# EAGLE board trill-ring (EAGLE 6.5.0)
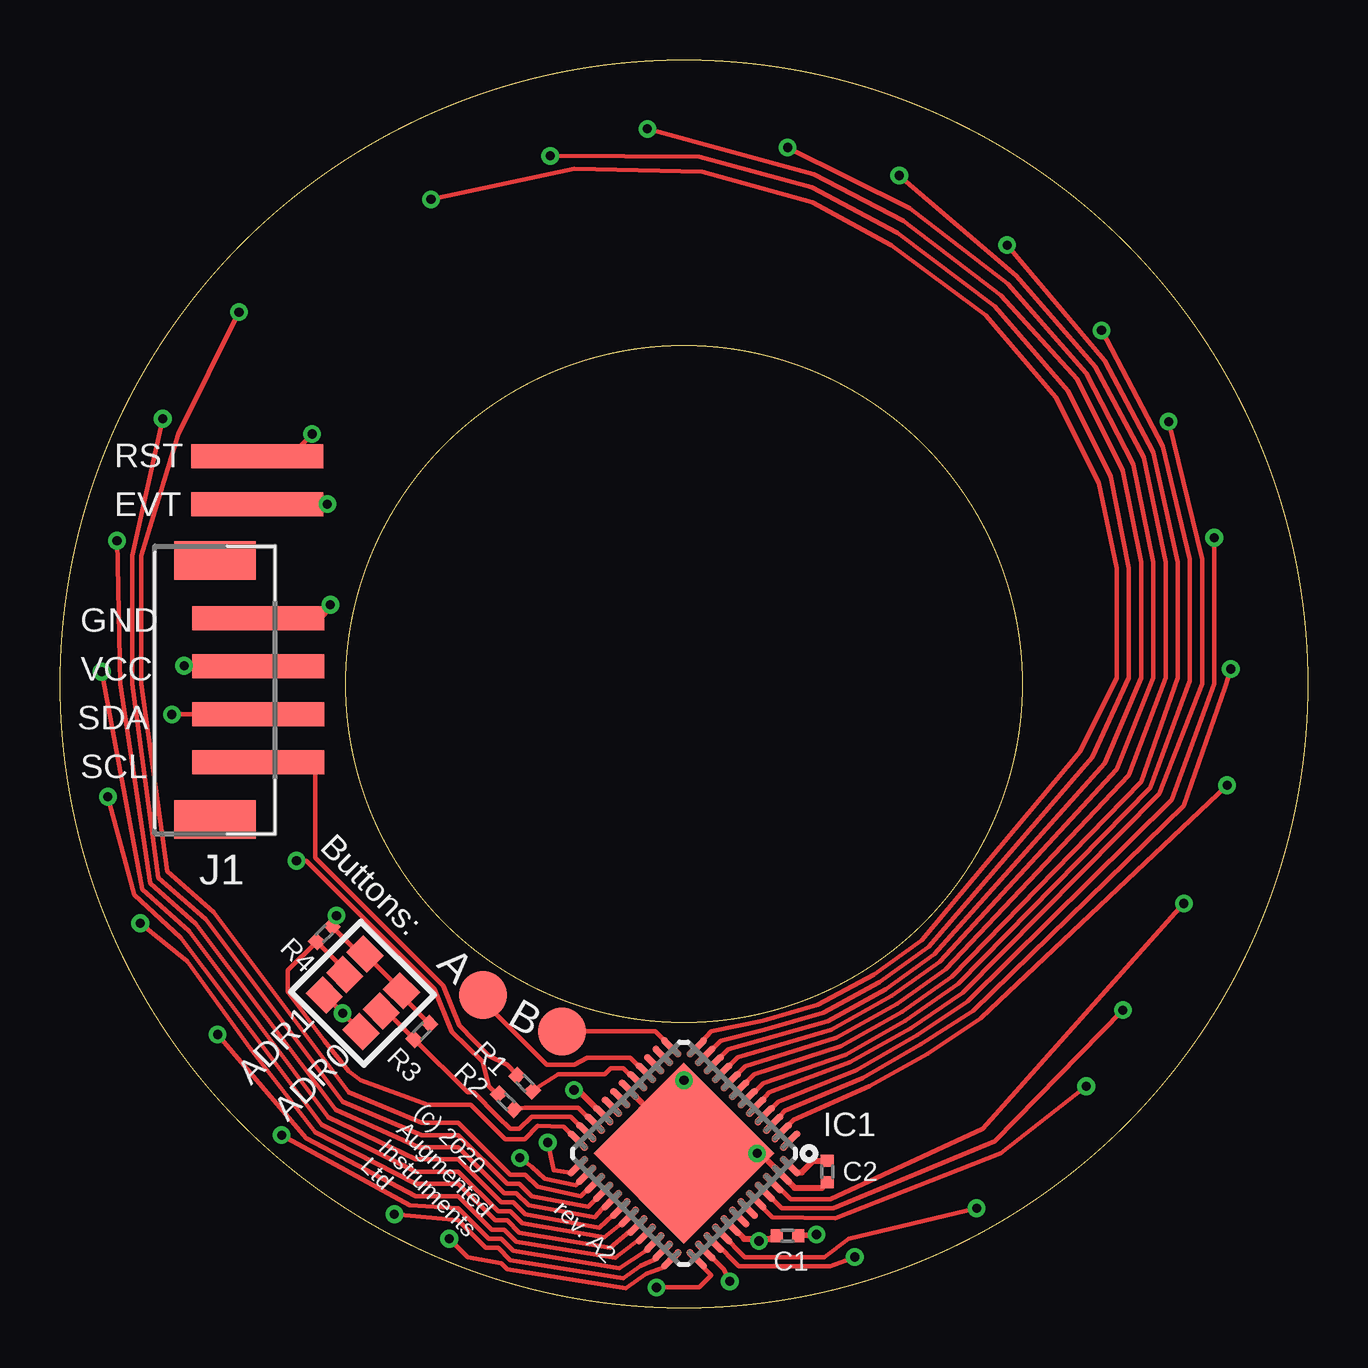
[diagram p0: board, top side]
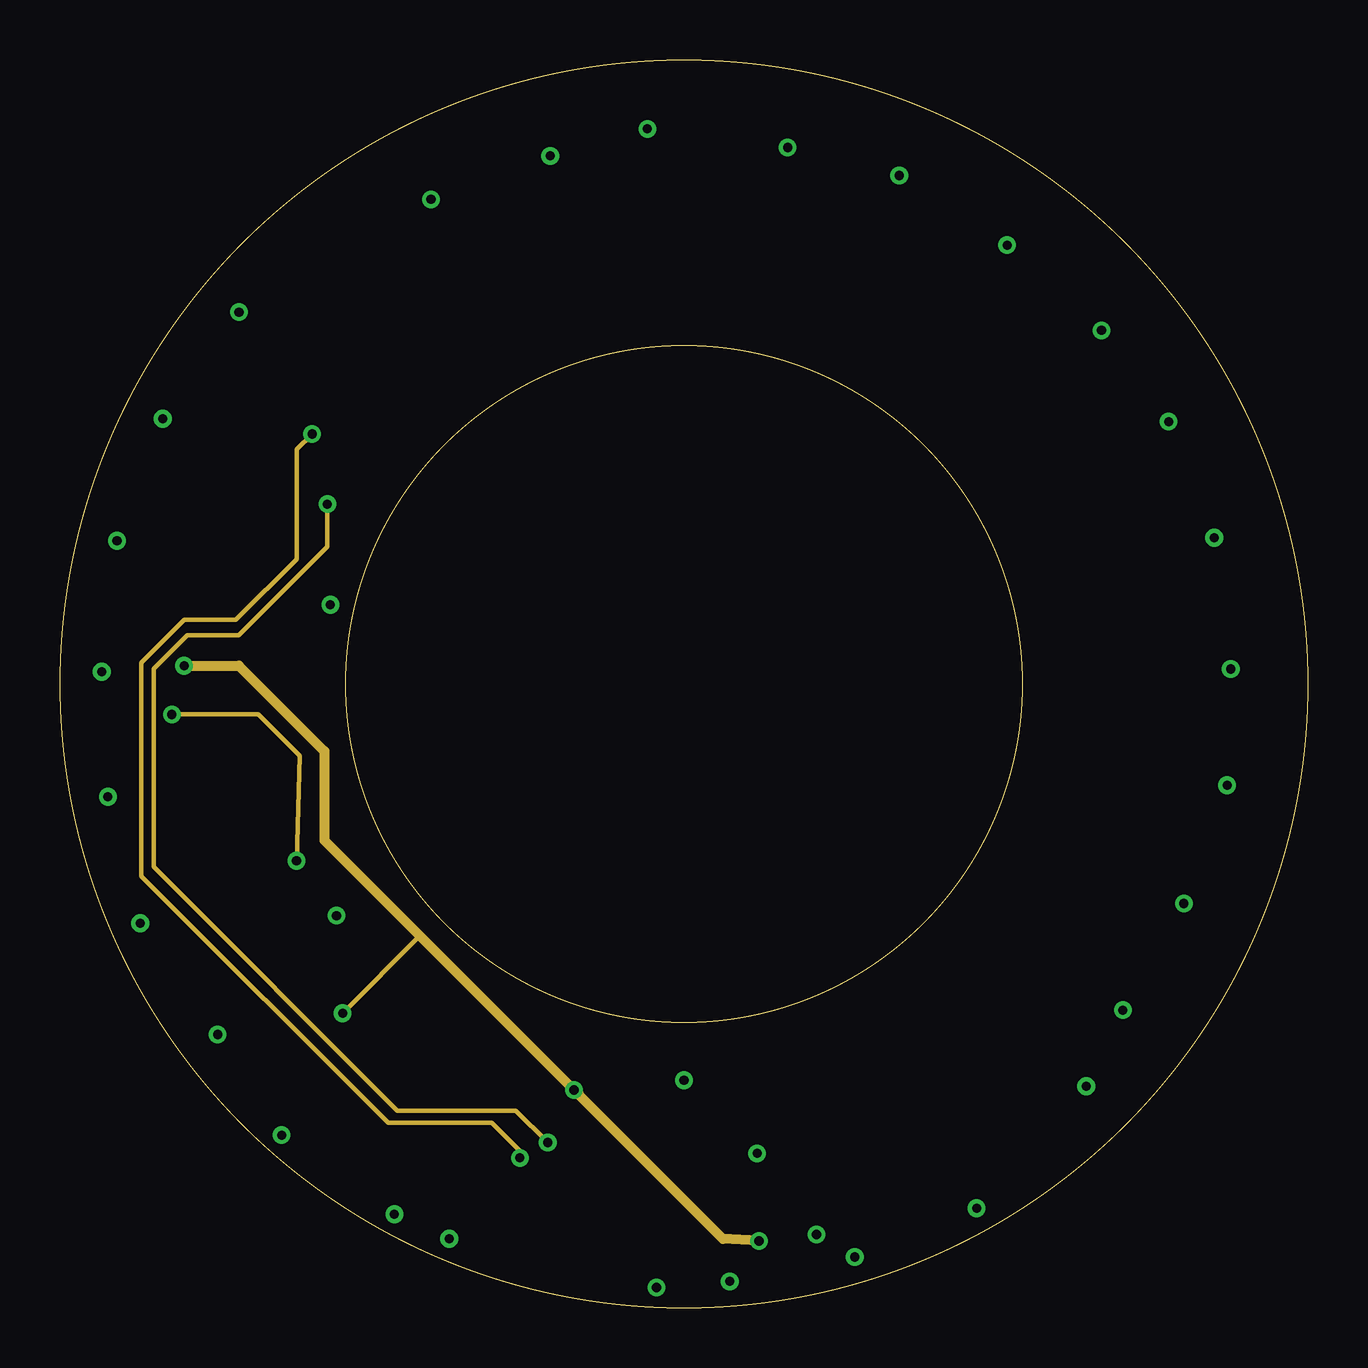
[diagram p1: board, inner layer Route2]
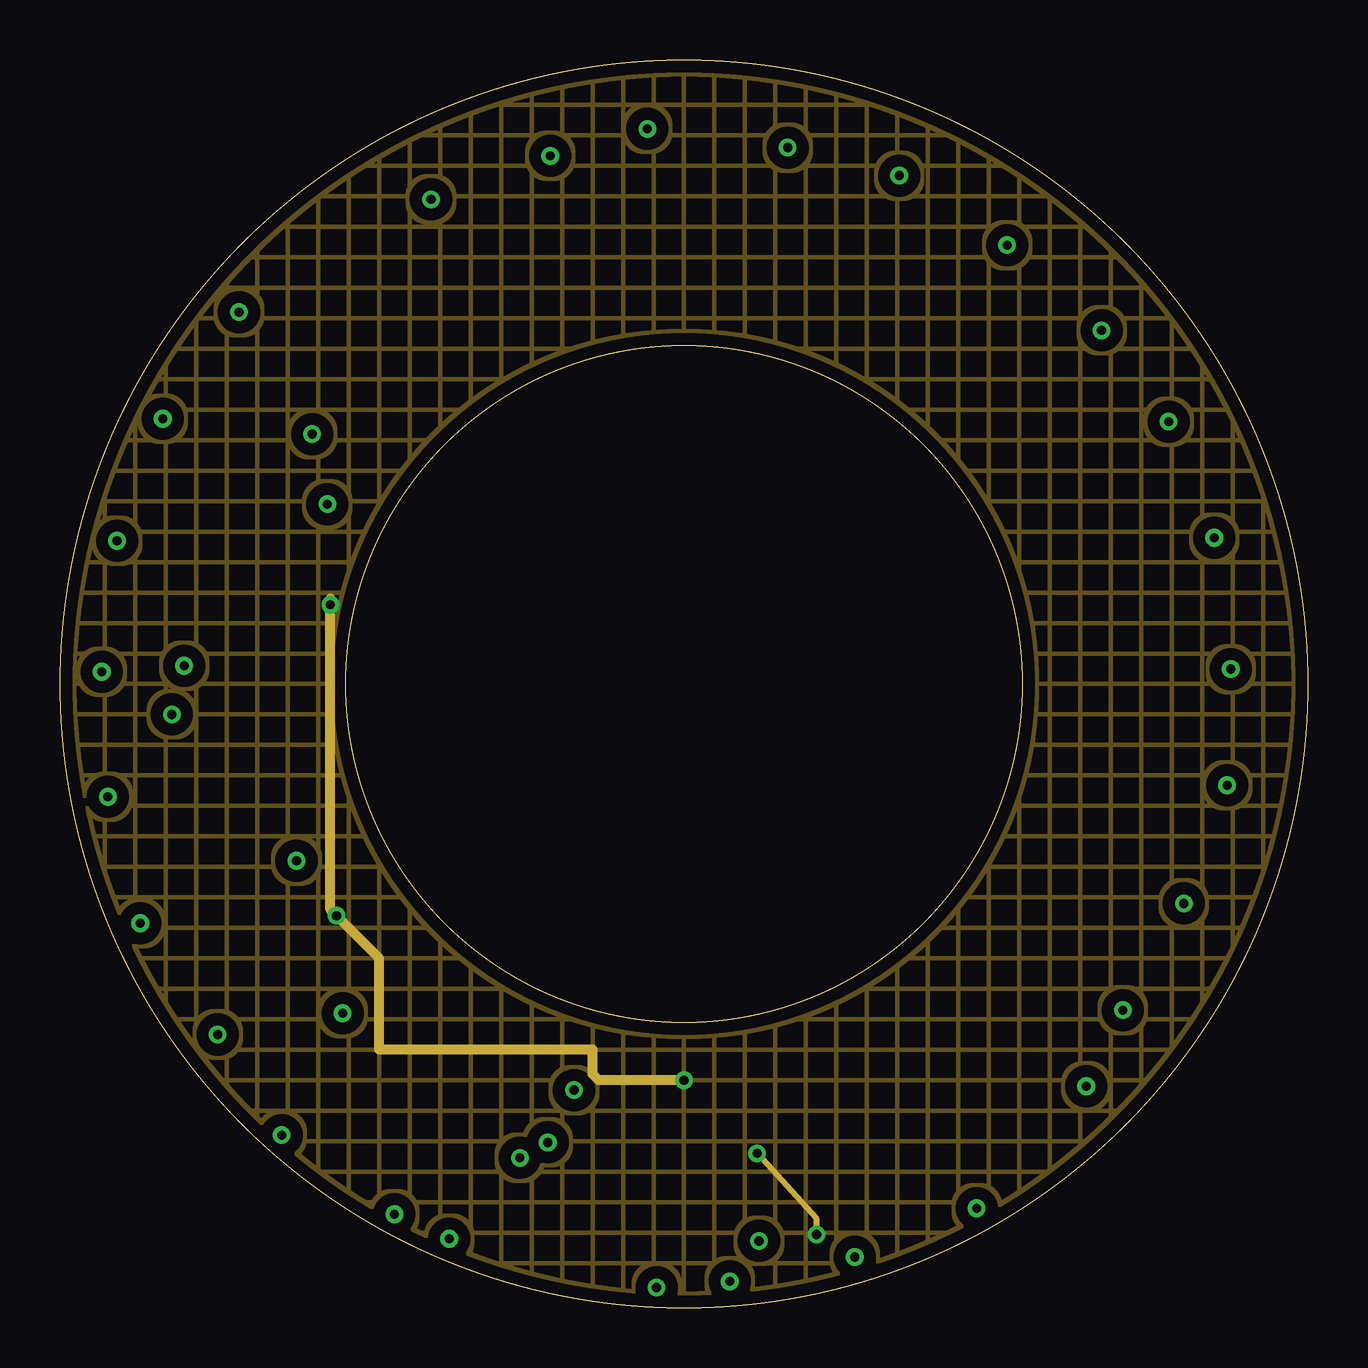
[diagram p2: board, inner layer Route3]
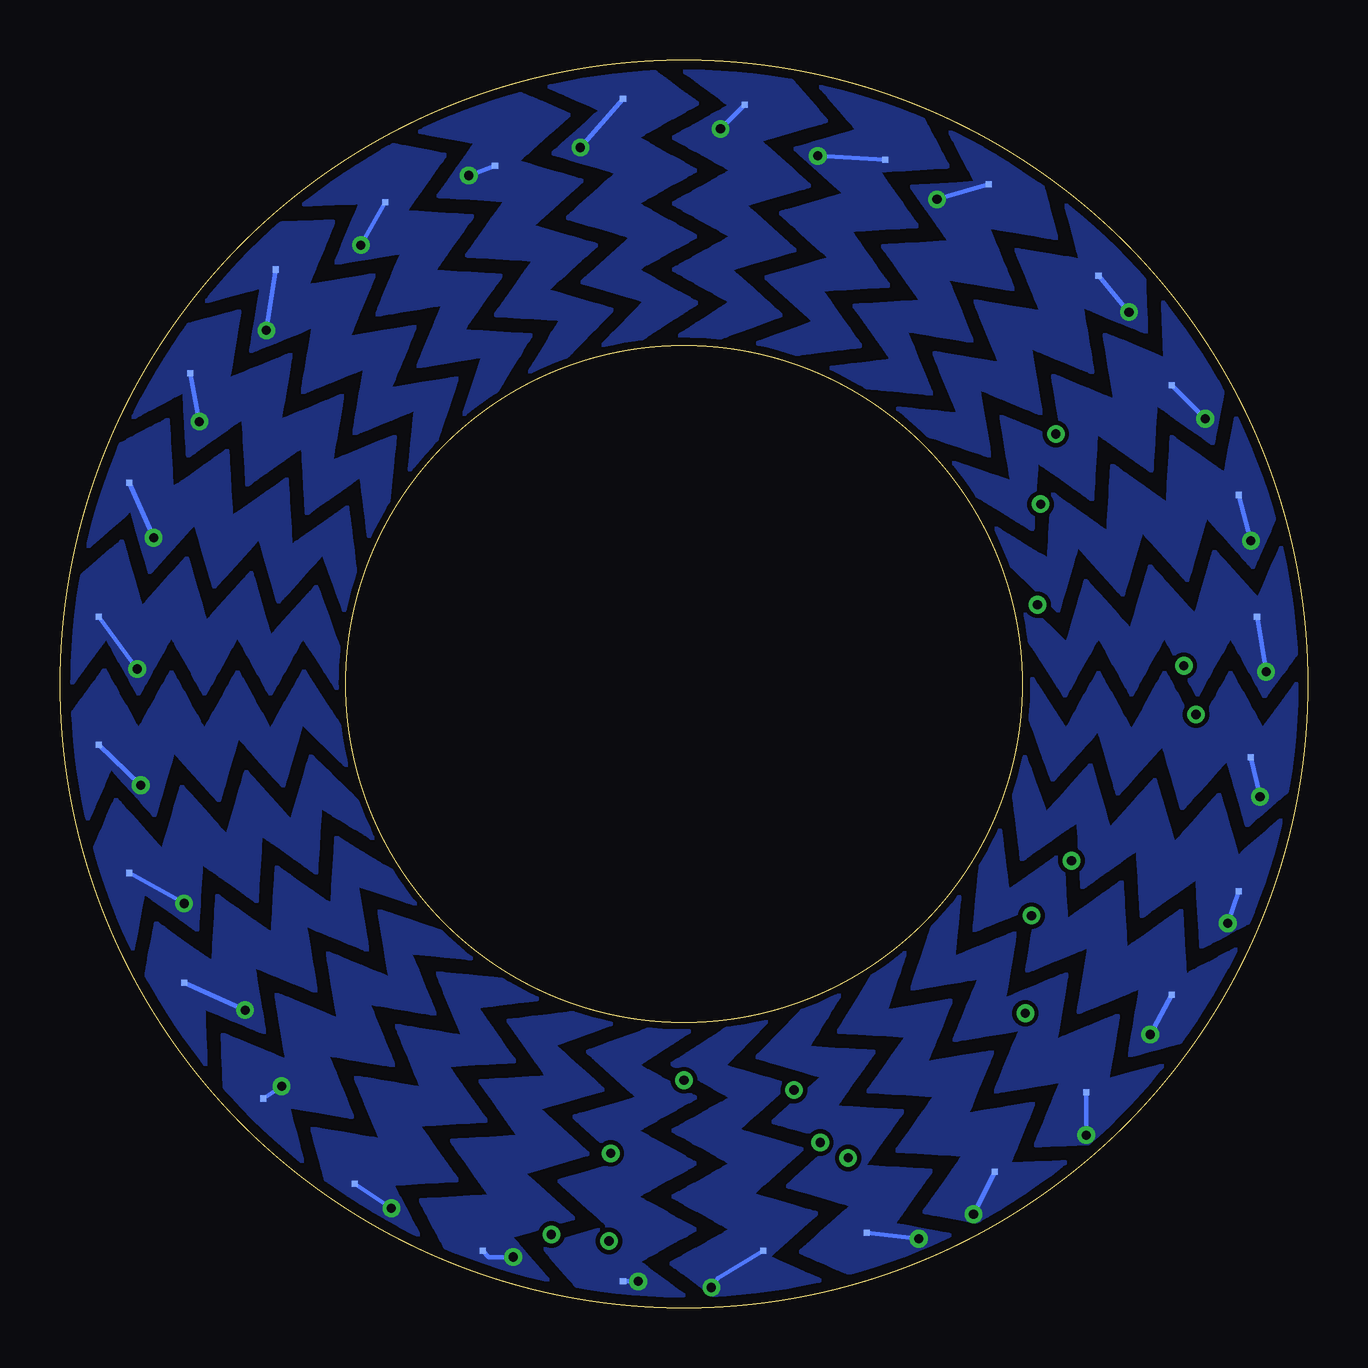
[diagram p3: board, bottom side, seen from below]

Size 52 x 52 mm. Coordinates in mm from the lower left corner, seen from the top.
Outline: circle at 26,26 radius 26
Outline: circle at 26,26 radius 14.1
Copper layers (1*2*3*16): Top 0.035mm / dielectric 0.2mm / Route2 0.035mm / dielectric 1.1mm / Route3 0.035mm / dielectric 0.2mm / Bottom 0.035mm
Design rules "default *": minimum track width 7mil, minimum drill 15mil, track to track 7mil, track to pad 7mil, pad to pad 7mil, via to via 7mil, smd to smd 0mil, copper to edge 5mil, drill to drill 7mil, minimum pad ring 7mil, minimum via ring 7mil, stop-mask expansion 4mil, vias tented up to drill 20mil, thermal gap 10mil

## Footprints (pad centres in the part's own frame; a part is rotated, then mirrored left to right if it is on the bottom)
C0402-SMALL = smd 0.5 x 0.55: P$1 -0.45,0; P$2 0.45,0
QFN48-LEADS = smd 1.1 x 0.3: 1 -3.5,2.75; 2 -3.5,2.25; 3 -3.5,1.75; 4 -3.5,1.25; 5 -3.5,0.75; 6 -3.5,0.25; 7 -3.5,-0.25; 8 -3.5,-0.75; 9 -3.5,-1.25; 10 -3.5,-1.75; 11 -3.5,-2.25; 12 -3.5,-2.75; 25 3.5,-2.75; 26 3.5,-2.25; 27 3.5,-1.75; 28 3.5,-1.25; 29 3.5,-0.75; 30 3.5,-0.25; 31 3.5,0.25; 32 3.5,0.75; 33 3.5,1.25; 34 3.5,1.75; 35 3.5,2.25; 36 3.5,2.75 | smd 0.3 x 1.1: 13 -2.75,-3.5; 14 -2.25,-3.5; 15 -1.75,-3.5; 16 -1.25,-3.5; 17 -0.75,-3.5; 18 -0.25,-3.5; 19 0.25,-3.5; 20 0.75,-3.5; 21 1.25,-3.5; 22 1.75,-3.5; 23 2.25,-3.5; 24 2.75,-3.5; 37 2.75,3.5; 38 2.25,3.5; 39 1.75,3.5; 40 1.25,3.5; 41 0.75,3.5; 42 0.25,3.5; 43 -0.25,3.5; 44 -0.75,3.5; 45 -1.25,3.5; 46 -1.75,3.5; 47 -2.25,3.5; 48 -2.75,3.5 | smd 5.33 x 5.33: EXP 0,0
JST-PH-4-SMT = smd 1 x 5.5: 1 -3,-0.8; 2 -1,-0.8; 3 1,-0.8; 4 3,-0.8 | smd 1.6 x 3.4: NC1 -5.4,1; NC2 5.4,1
TP20R = smd 2 x 2: TP 0,0
TESTPAD-SMALL = smd 0.254 x 0.254: P$1 0,0
JST-SMT-EXTRAPAD = smd 1 x 5.5: P$1 0,0
SOLDER_JUMPER_3PAD = smd 1 x 1.2: P$1 0,0; P$2 1.2,0; P$3 2.4,0

## Placement (x,y rotation side)
C1  C0402-SMALL  [C0402-SMALL]  30.31,3.01 180 top
C2  C0402-SMALL  [C0402-SMALL]  31.97,5.68 270 top
IC1  CY8C206X6A  [QFN48-LEADS]  26,6.44 225 top
J1  GROVE-SMT  [JST-PH-4-SMT]  7.46,25.75 90 top
R1  R0402-SMALL  [C0402-SMALL]  19.36,9.36 135 top
R2  R0402-SMALL  [C0402-SMALL]  18.6,8.6 135 top
R3  R0402-SMALL  [C0402-SMALL]  15.08,11.52 225 top
R4  R0402-SMALL  [C0402-SMALL]  11.01,15.59 225 top
TP1  TPSTP20R  [TP20R]  20.92,11.52 0 top
TP2  TPSTP20R  [TP20R]  17.62,13.05 0 top
U$1  TP-SMALL  [TESTPAD-SMALL]  50.38,23.46 0 bottom
U$2  JST-SMT-EXTRAPAD  [JST-SMT-EXTRAPAD]  8.22,33.49 90 top
U$3  JST-SMT-EXTRAPAD  [JST-SMT-EXTRAPAD]  8.22,35.49 90 top
U$4  TP-SMALL  [TESTPAD-SMALL]  50.38,28.79 270 bottom
U$5  TP-SMALL  [TESTPAD-SMALL]  49.11,34.38 270 bottom
U$6  TP-SMALL  [TESTPAD-SMALL]  46.57,38.95 270 bottom
U$7  TP-SMALL  [TESTPAD-SMALL]  43.02,43.27 270 bottom
U$8  TP-SMALL  [TESTPAD-SMALL]  38.45,46.07 270 bottom
U$9  TP-SMALL  [TESTPAD-SMALL]  33.87,47.59 270 bottom
U$10  TP-SMALL  [TESTPAD-SMALL]  28.54,50.38 270 bottom
U$11  TP-SMALL  [TESTPAD-SMALL]  23.46,50.13 270 bottom
U$12  TP-SMALL  [TESTPAD-SMALL]  17.62,47.84 270 bottom
U$13  TP-SMALL  [TESTPAD-SMALL]  13.3,46.83 270 bottom
U$14  SOLDER_JUMPER_3PAD  [SOLDER_JUMPER_3PAD]  12.54,11.52 45 top
U$15  SOLDER_JUMPER_3PAD  [SOLDER_JUMPER_3PAD]  11.01,13.05 45 top
U$16  TP-SMALL  [TESTPAD-SMALL]  8.73,43.02 270 bottom
U$17  TP-SMALL  [TESTPAD-SMALL]  5.68,38.45 270 bottom
U$18  TP-SMALL  [TESTPAD-SMALL]  2.89,33.87 270 bottom
U$19  TP-SMALL  [TESTPAD-SMALL]  2.12,28.79 270 bottom
U$20  TP-SMALL  [TESTPAD-SMALL]  2.38,22.95 270 bottom
U$21  TP-SMALL  [TESTPAD-SMALL]  2.89,17.36 270 bottom
U$22  TP-SMALL  [TESTPAD-SMALL]  5.68,13.05 270 bottom
U$23  TP-SMALL  [TESTPAD-SMALL]  9.24,8.98 270 bottom
U$24  TP-SMALL  [TESTPAD-SMALL]  13.05,5.68 270 bottom
U$25  TP-SMALL  [TESTPAD-SMALL]  18.38,3.14 270 bottom
U$26  TP-SMALL  [TESTPAD-SMALL]  22.7,2.38 270 bottom
U$27  TP-SMALL  [TESTPAD-SMALL]  28.54,1.11 270 bottom
U$28  TP-SMALL  [TESTPAD-SMALL]  34.38,2.38 270 bottom
U$29  TP-SMALL  [TESTPAD-SMALL]  39.72,5.17 270 bottom
U$30  TP-SMALL  [TESTPAD-SMALL]  43.53,8.73 270 bottom
U$31  TP-SMALL  [TESTPAD-SMALL]  46.83,13.55 270 bottom
U$32  TP-SMALL  [TESTPAD-SMALL]  49.11,18.13 270 bottom

## Library data of the parts
C1 C2 IC1 J1 R1-R4 U$1-U$32 = custom
TP1 TP2 = testpad

## Nets
ADDR0: IC1.23 R3.P$2 U$14.P$2
ADDR1: IC1.24 R4.P$2 U$15.P$2
EVENT: IC1.25 U$2.P$1
GND: C1.P$1 C2.P$2 IC1.18 IC1.47 IC1.EXP J1.4 R3.P$1 R4.P$1 U$14.P$3 U$15.P$3
I2C_SCL: J1.1 R1.P$2
I2C_SDA: J1.2 R2.P$2
N$3: C2.P$1 IC1.48
N$71Z1Z1O1K1: IC1.17 R1.P$1
N$72Z1Z1O1K1: IC1.22 R2.P$1
SENSOR1: IC1.2 U$1.P$1
SENSOR2: IC1.3 U$4.P$1
SENSOR3: IC1.4 U$5.P$1
SENSOR4: IC1.5 U$6.P$1
SENSOR5: IC1.6 U$7.P$1
SENSOR6: IC1.7 U$8.P$1
SENSOR7: IC1.8 U$9.P$1
SENSOR8: IC1.9 U$10.P$1
SENSOR9: IC1.10 U$11.P$1
SENSOR10: IC1.11 U$12.P$1
SENSOR11: IC1.12 U$13.P$1
SENSOR12: IC1.13 TP1.TP
SENSOR13: IC1.16 TP2.TP
SENSOR14: IC1.27 U$16.P$1
SENSOR15: IC1.28 U$17.P$1
SENSOR16: IC1.29 U$18.P$1
SENSOR17: IC1.30 U$19.P$1
SENSOR18: IC1.31 U$20.P$1
SENSOR19: IC1.32 U$21.P$1
SENSOR20: IC1.33 U$22.P$1
SENSOR21: IC1.34 U$23.P$1
SENSOR22: IC1.35 U$24.P$1
SENSOR23: IC1.36 U$25.P$1
SENSOR24: IC1.37 U$26.P$1
SENSOR25: IC1.38 U$27.P$1
SENSOR26: IC1.39 U$28.P$1
SENSOR27: IC1.40 U$29.P$1
SENSOR28: IC1.44 U$30.P$1
SENSOR29: IC1.45 U$31.P$1
SENSOR30: IC1.46 U$32.P$1
VCC: C1.P$2 IC1.21 IC1.41 J1.3 U$14.P$1 U$15.P$1
XRES: IC1.26 U$3.P$1

## Tracks (layer width: path | path; a pad name or v marks a point on that pad's centre or on a via)
ADDR0
  Top 0.178: IC1.23 21.29,7.97 19.66,7.97 19.14,7.46 18.75,7.46 18.24,7.97 17.24,8.98 16.98,8.98 R3.P$2 13.59,12.37 U$14.P$2
ADDR1
  Top 0.178: IC1.24 21.57,6.97 20.99,7.55 19.9,7.58 19.36,7.04 18.54,7.04 17.11,8.47 15.33,8.47 12.54,9.49 12.03,9.87 11.01,11.14 9.49,13.17 9.49,14.06 R4.P$2 11.86,14.1 U$15.P$2
EVENT  (via drill 0.38)
  Top 0.178: U$2.P$1 v11.14,33.49 | IC1.25 21.28,5.63 20.56,5.74 v20.32,6.9
  Route2 0.178: 20.21,6.69 v20.32,6.9 19,8.22 14.06,8.22 3.9,18.38 3.9,26.63 5.3,28.03 7.46,28.03 11.14,31.71 v11.14,33.49
GND  (via drill 0.38)
  Top 0.178: R3.P$1 14.23,13 U$14.P$3 U$15.P$3 12.49,14.74 R4.P$1 11.33,16.16 v11.52,16.35
  Top 0.254: C2.P$2 31.75,5.01 30.61,5.01 IC1.47 29.37,6.26 v29.05,6.44 IC1.EXP 25.24,7.56 IC1.18 | C1.P$1 v31.52,3.06
  Top 0.406: J1.4 10.71,28.75 v11.27,29.3
  Route3 0.254: 31.58,3.04 v31.52,3.06 31.52,3.71 v29.05,6.44
  Route3 0.406: 11.27,29.56 v11.27,29.3 11.27,16.6 v11.52,16.35 13.3,14.57 13.3,10.76 22.19,10.76 22.19,9.74 22.44,9.49 v26,9.49
  pour Route3 (isolate 0.508, hatched): -0.42,52.42 52.42,52.42 52.42,-0.42 -0.42,-0.42
I2C_SCL
  Top 0.178: R1.P$2 19.04,9.72 18.63,10.12 17.87,10.51 16.63,11.77 15.97,13.43 10.63,18.76 10.63,22.7 8.31,22.7 J1.1
I2C_SDA  (via drill 0.38)
  Top 0.178: R2.P$2 18.19,8.92 17.87,9.24 17.62,10.25 16.33,11.51 15.59,13.3 10.25,18.63 v9.85,18.63 | v4.66,24.73 8.24,24.73 J1.2
  Route2 0.178: v9.85,18.63 10,23.01 J1.2 4.68,24.75 v4.66,24.73
N$3
  Top 0.254: IC1.48 30.69,5.65 30.91,5.65 31.39,6.13 C2.P$1
N$71Z1Z1O1K1
  Top 0.178: IC1.17 24.01,9.45 23.46,10 22.95,10 22.7,9.74 20.75,9.74 R1.P$1
N$72Z1Z1O1K1
  Top 0.178: IC1.22 22.26,7.68 21.59,8.35 19.35,8.35 R2.P$1
SENSOR1  (via drill 0.38)
  Top 0.178: IC1.2 30.57,7.84 33.72,9.24 36.16,10.6 38.36,12.07 v48.63,21.78
  Bottom 0.178: v48.63,21.78 U$1.P$1
  pour Bottom: 314 corners
SENSOR2  (via drill 0.38)
  Top 0.178: IC1.3 30.19,8.22 33.43,9.57 35.86,10.99 38.04,12.39 46.83,20.92 48.54,25.89 v48.78,26.62
  Bottom 0.178: v48.78,26.62 U$4.P$1
  pour Bottom: 312 corners
SENSOR3  (via drill 0.38)
  Top 0.178: IC1.4 29.94,8.6 33.18,9.9 35.74,11.38 37.83,12.79 46.32,21.17 48.1,26 v48.1,32.1
  Bottom 0.178: v48.1,32.1 U$5.P$1
  pour Bottom: 313 corners
SENSOR4  (via drill 0.38)
  Top 0.178: IC1.5 29.56,8.98 32.91,10.23 35.44,11.66 37.62,13.14 45.81,21.43 47.59,26 47.59,31.21 v46.19,36.93
  Bottom 0.178: v46.19,36.93 U$6.P$1
  pour Bottom: 314 corners
SENSOR5  (via drill 0.38)
  Top 0.178: IC1.6 29.3,9.36 32.73,10.56 35.23,11.98 37.43,13.51 45.43,21.68 47.08,26.13 47.08,31.21 45.94,35.91 v43.4,40.73
  Bottom 0.178: v43.4,40.73 U$7.P$1
  pour Bottom: 314 corners
SENSOR6  (via drill 0.38)
  Top 0.178: IC1.7 28.92,9.74 32.53,10.91 35.09,12.34 37.15,13.81 45.05,21.94 46.57,26.25 46.57,31.08 45.56,35.65 43.53,39.46 v39.46,44.29
  Bottom 0.178: v39.46,44.29 U$8.P$1
  pour Bottom: 312 corners
SENSOR7  (via drill 0.38)
  Top 0.178: IC1.8 28.55,10.07 32.34,11.26 34.89,12.67 36.9,14.12 44.54,22.19 46.07,26.25 46.07,31.08 45.16,35.45 43.14,39.21 39.84,43.02 v34.97,47.18
  Bottom 0.178: v34.97,47.18 U$9.P$1
  pour Bottom: 314 corners
SENSOR8  (via drill 0.38)
  Top 0.178: IC1.9 28.24,10.45 32.14,11.59 34.66,13 36.66,14.42 44.03,22.44 45.56,26.25 45.56,31.08 44.73,35.15 42.76,38.95 39.48,42.67 35.4,45.81 v30.32,48.35
  Bottom 0.178: v30.32,48.35 U$10.P$1
  pour Bottom: 314 corners
SENSOR9  (via drill 0.38)
  Top 0.178: IC1.10 27.85,10.78 31.98,11.94 34.41,13.29 36.43,14.73 43.53,22.7 45.05,26.25 45.05,31.08 44.29,34.89 42.38,38.7 39.21,42.19 35.14,45.3 31.4,47.24 v24.48,49.13
  Bottom 0.178: v24.48,49.13 U$11.P$1
  pour Bottom: 312 corners
SENSOR10  (via drill 0.38)
  Top 0.178: IC1.11 27.52,11.14 29.35,11.6 31.79,12.29 34.13,13.58 36.19,15.05 43.02,22.95 44.54,26.25 44.54,30.83 43.78,34.64 42,38.19 38.95,41.75 34.89,44.8 31.32,46.7 26.63,47.97 v20.43,48
  Bottom 0.178: v20.43,48 U$12.P$1
  pour Bottom: 314 corners
SENSOR11  (via drill 0.38)
  Top 0.178: IC1.12 27.14,11.52 29.29,11.98 31.58,12.63 33.91,13.88 35.91,15.33 42.51,23.21 44.03,26.25 44.03,30.83 43.27,34.38 41.49,37.94 38.57,41.37 34.64,44.29 31.33,46.07 26.76,47.34 21.43,47.46 v15.46,46.19
  Bottom 0.178: v15.46,46.19 U$13.P$1
  pour Bottom: 313 corners
SENSOR12
  Top 0.178: TP1.TP 24.81,11.52 IC1.13
SENSOR13
  Top 0.178: IC1.16 24.37,9.8 23.75,10.42 21.97,10.42 21.43,10.12 20.28,10.12 17.62,12.79 TP2.TP
SENSOR14  (via drill 0.38)
  Top 0.178: IC1.27 22.22,5.2 21.69,4.65 19.9,5.04 19.4,5.55 18.76,5.55 16.6,7.71 15.08,7.71 12.03,8.98 6.41,16.48 4.46,18.19 3.39,26 3.39,31.33 4.92,36.41 v7.46,41.49
  Bottom 0.178: v7.46,41.49 U$16.P$1
  pour Bottom: 314 corners
SENSOR15  (via drill 0.38)
  Top 0.178: IC1.28 22.02,4.21 19.65,4.66 19.14,5.17 18.63,5.17 16.6,7.2 15.08,7.2 11.78,8.6 6.08,16.2 4.09,17.93 3.01,26 3.01,31.33 v4.28,37.05
  Bottom 0.178: v4.28,37.05 U$17.P$1
  pour Bottom: 314 corners
SENSOR16  (via drill 0.38)
  Top 0.178: IC1.29 22.91,4.5 22.29,3.77 19.52,4.28 19.01,4.79 18.51,4.79 16.6,6.7 14.95,6.7 11.5,8.27 5.65,16.01 3.76,17.7 2.5,26 v2.38,31.97
  Bottom 0.178: v2.38,31.97 U$18.P$1
  pour Bottom: 314 corners
SENSOR17  (via drill 0.38)
  Top 0.178: IC1.30 23.32,4.14 22.46,3.35 19.4,3.9 18.89,4.41 18.38,4.41 16.6,6.19 14.82,6.19 11.18,7.96 5.38,15.7 3.43,17.46 v1.74,26.51
  Bottom 0.178: v1.74,26.51 U$19.P$1
  pour Bottom: 314 corners
SENSOR18  (via drill 0.38)
  Top 0.178: IC1.31 23.7,3.76 22.68,2.94 19.27,3.52 18.76,4.03 18.25,4.03 16.6,5.68 14.82,5.68 10.91,7.63 5.03,15.42 3.1,17.22 v2,21.3
  Bottom 0.178: v2,21.3 U$20.P$1
  pour Bottom: 312 corners
SENSOR19  (via drill 0.38)
  Top 0.178: IC1.32 24.01,3.44 22.93,2.51 19.14,3.14 18.63,3.65 18.13,3.65 16.6,5.17 14.82,5.17 10.63,7.33 7.97,10.76 5.3,14.44 v3.34,16.03
  Bottom 0.178: v3.34,16.03 U$21.P$1
  pour Bottom: 314 corners
SENSOR20  (via drill 0.38)
  Top 0.178: IC1.33 23.14,2.09 19.01,2.76 18.51,3.27 18,3.27 16.6,4.66 14.82,4.66 10.25,7.08 v6.57,11.39
  Bottom 0.178: v6.57,11.39 U$22.P$1
  pour Bottom: 314 corners
SENSOR21  (via drill 0.38)
  Top 0.178: IC1.34 24.7,2.73 24.38,2.37 23.29,1.66 18.89,2.38 18.38,2.89 17.87,2.89 16.6,4.16 14.57,4.28 v9.24,7.2
  Bottom 0.178: v9.24,7.2 U$23.P$1
  pour Bottom: 314 corners
SENSOR22  (via drill 0.38)
  Top 0.178: IC1.35 25.11,2.38 24.76,2 24.19,1.75 23.47,1.23 18.76,2 18.25,2.5 17.74,2.5 16.6,3.65 v13.93,3.9
  Bottom 0.178: v13.93,3.9 U$24.P$1
  pour Bottom: 314 corners
SENSOR23  (via drill 0.38)
  Top 0.178: IC1.36 25.39,2.02 25.12,1.69 24.43,1.43 23.58,0.81 18.63,1.62 18.38,1.87 16.98,2.12 v16.22,2.89
  Bottom 0.178: U$25.P$1 v16.22,2.89
  pour Bottom: 314 corners
SENSOR24  (via drill 0.38)
  Top 0.178: IC1.37 26.53,1.97 27.14,1.36 26.63,0.85 v24.86,0.85
  Bottom 0.178: v24.86,0.85 24.6,1.23 U$26.P$1
  pour Bottom: 314 corners
SENSOR25  (via drill 0.38)
  Top 0.178: IC1.38 26.89,2.38 27.65,1.62 v27.9,1.11
  Bottom 0.178: v27.9,1.11 U$27.P$1
  pour Bottom: 312 corners
SENSOR26  (via drill 0.38)
  Top 0.178: IC1.39 27.3,2.73 28.29,1.74 32.1,1.74 v33.11,2.12
  Bottom 0.178: v33.11,2.12 34.13,2.12 U$28.P$1
  pour Bottom: 313 corners
SENSOR27  (via drill 0.38)
  Top 0.178: IC1.40 28.54,2.12 31.84,2.12 32.86,2.89 v38.19,4.16
  Bottom 0.178: v38.19,4.16 U$29.P$1
  pour Bottom: 314 corners
SENSOR28  (via drill 0.38)
  Top 0.178: IC1.44 29,4.45 29.68,3.77 32.29,3.75 39.21,6.44 v42.76,9.24
  Bottom 0.178: v42.76,9.24 U$30.P$1
  pour Bottom: 314 corners
SENSOR29  (via drill 0.38)
  Top 0.178: IC1.45 30.06,4.16 32.22,4.16 38.95,6.95 v44.29,12.41
  Bottom 0.178: v44.29,12.41 U$31.P$1
  pour Bottom: 314 corners
SENSOR30  (via drill 0.38)
  Top 0.178: IC1.46 29.78,5.2 30.44,4.54 32.1,4.54 38.45,7.46 v46.83,16.86
  Bottom 0.178: v46.83,16.86 U$32.P$1
  pour Bottom: 314 corners
VCC  (via drill 0.38)
  Top 0.178: U$14.P$1 v11.78,12.28 U$15.P$1 | C1.P$2 29.62,2.89 v29.13,2.79
  Top 0.254: IC1.41 28.51,2.88 29.57,2.88 C1.P$2 | IC1.21 21.68,8.98 v21.42,9.08
  Top 0.406: J1.3 5.19,26.75 v5.17,26.76
  Route2 0.178: v11.78,12.28 | v11.78,12.28 15,15.5
  Route2 0.254: v21.42,9.08 21.68,8.98
  Route2 0.406: v5.17,26.76 7.46,26.76 11.01,23.21 11.01,19.48 15,15.5 v21.42,9.08 27.62,2.88 v29.13,2.79
XRES  (via drill 0.38)
  Top 0.178: U$3.P$1 9.58,35.49 v10.51,36.41 | IC1.26 21.49,5.12 20.19,5.39 19.66,5.89 v19.16,6.25
  Route2 0.178: v19.16,6.25 19.14,6.31 19.14,6.57 18,7.71 13.68,7.71 3.39,18 3.39,26.89 5.17,28.67 7.33,28.67 9.87,31.21 9.87,35.78 v10.51,36.41

## Text on the board
tPlace: RST | EVT | GND | VCC | SDA | SCL | Buttons: | A | B | ADR1 | ADR0 | (c) 2020 / Augmented / Instruments / Ltd | rev. A2
tNames: R4 | R3 | C2